# EAGLE board hx711-RJ12-board (EAGLE 8.7.1)
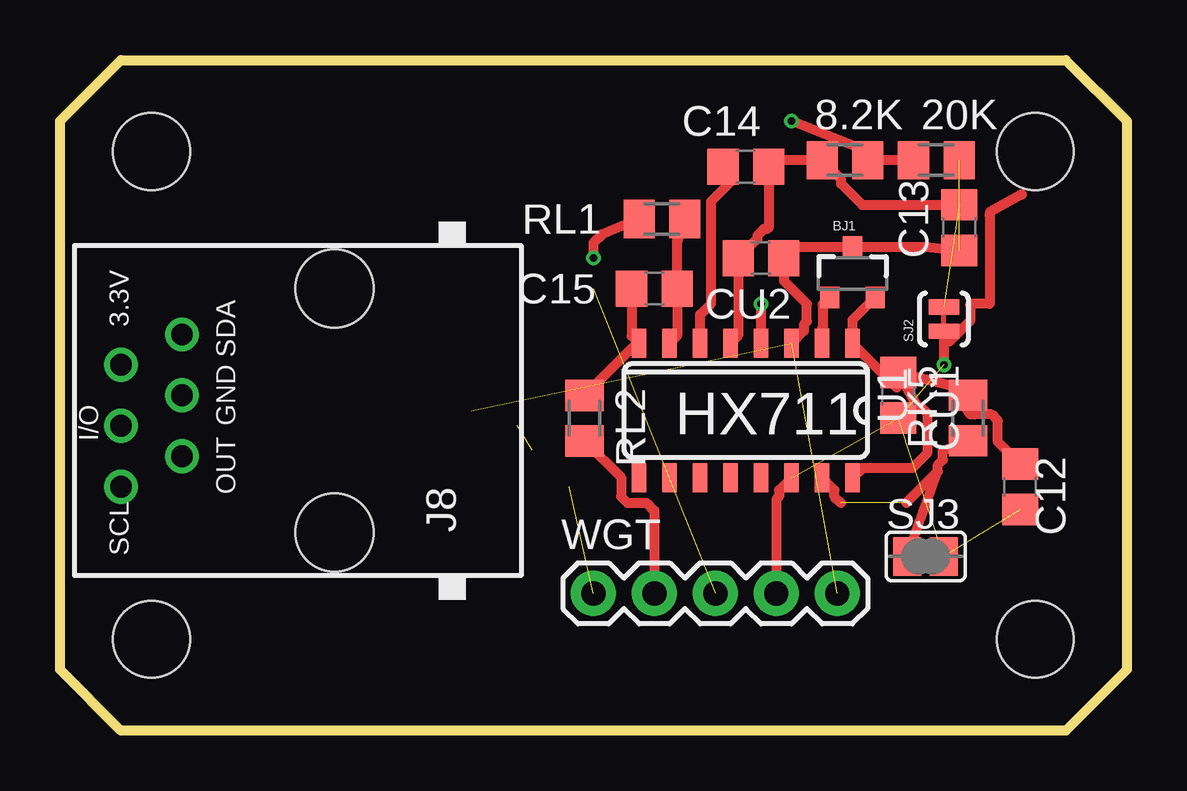
[diagram p0: board, top side]
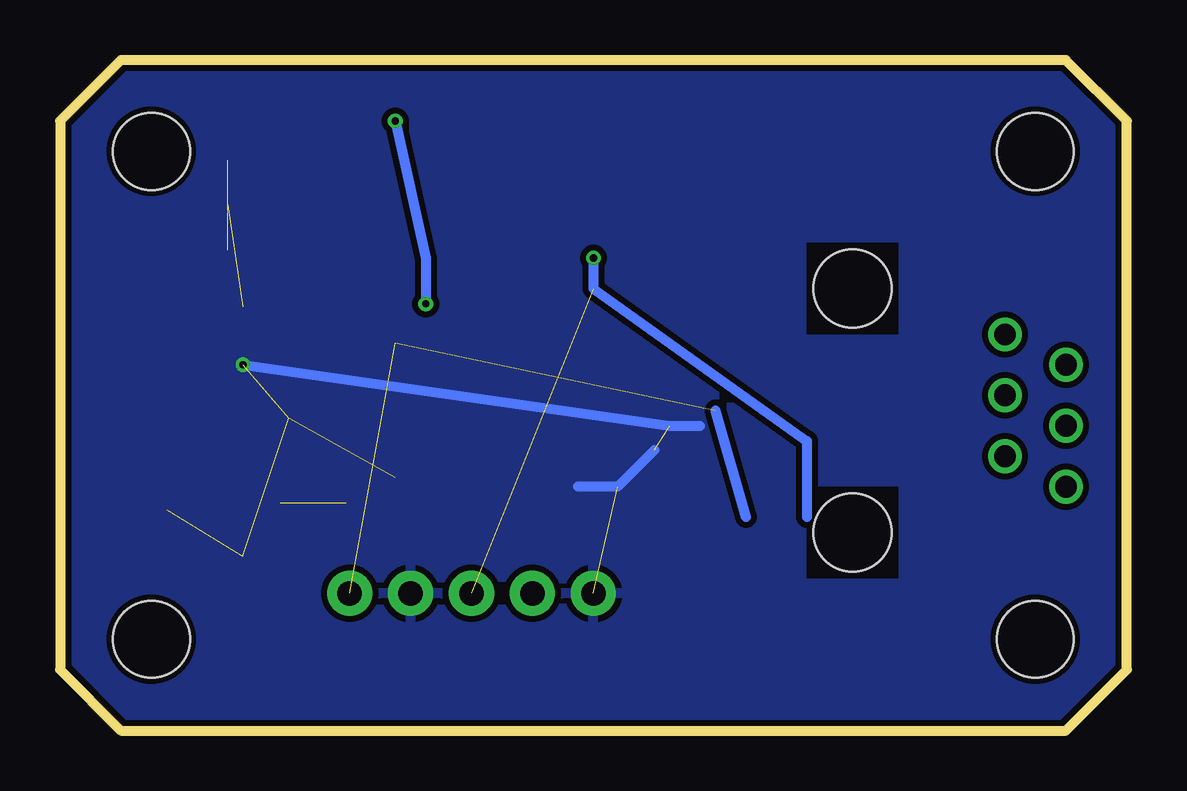
[diagram p1: board, bottom side, seen from below]

Size 44.45 x 27.94 mm. Coordinates in mm from the lower left corner, seen from the top.
Outline: 44.45,25.4 44.45,2.54 41.91,0 2.54,0 0,2.54 0,25.4 2.54,27.94 41.91,27.94 44.45,25.4
Copper layers (1*16): Top 0.035mm / dielectric 0.2mm / Bottom 0.035mm
Design rules "SeeedStudio_DRU_no_angle_20130527 *": minimum track width 6mil, minimum drill 12mil, track to track 6mil, track to pad 6mil, pad to pad 6mil, via to via 6mil, smd to smd 0mil, copper to edge 10mil, drill to drill 10mil, minimum pad ring 6mil, minimum via ring 6mil, stop-mask expansion 2mil, vias tented up to drill 25mil, thermal gap 10mil
Net classes: 0 default: width 0.406 mm, clearance 0.25 mm; 1 power: width 0.406 mm, drill 0.305 mm, clearance 0.25 mm; 2 VIN: width 0.406 mm, clearance 0.25 mm; 3 fine: width 0.406 mm, clearance 0.25 mm; 4 aref: width 0.406 mm, clearance 0.25 mm
Holes 3.2 mm at 40.64,24.13 40.64,3.81 3.81,24.13 3.81,3.81

## Footprints (pad centres in the part's own frame; a part is rotated, then mirrored left to right if it is on the bottom)
M0805 = smd 1.3 x 1.6: 1 -0.95,0; 2 0.95,0
SOT23-3 = smd 0.8 x 0.9: 1 -0.95,-1; 2 0.95,-1; 3 0,1.1
C0805 = smd 1.3 x 1.5: 1 -0.95,0; 2 0.95,0
RJ12-STRAIGHT-3.3 = drill 0.9 pad 1.4: +3.3V 1.905,8.89; GND 0.635,6.35; I/O -0.635,8.89; OUT -1.905,6.35; SCL -3.175,8.89; SDA 3.175,6.35 | hole 3.251: -5.08,0; 5.08,0
PAD-JUMPER-2-NC_BY_TRACE_YES_SILK = smd 0.635 x 1.27: 1 -0.508,0; 2 0.508,0
SJ = smd 1.168 x 1.6: 1 -0.762,0; 2 0.762,0
SO16 = smd 0.6 x 1.2: 1 -4.445,-2.8; 2 -3.175,-2.8; 3 -1.905,-2.8; 4 -0.635,-2.8; 5 0.635,-2.8; 6 1.905,-2.8; 7 3.175,-2.8; 8 4.445,-2.8; 9 4.445,2.8; 10 3.175,2.8; 11 1.905,2.8; 12 0.635,2.8; 13 -0.635,2.8; 14 -1.905,2.8; 15 -3.175,2.8; 16 -4.445,2.8
1X05 = drill 1.016 pad 1.88: 1 0,0; 2 2.54,0; 3 5.08,0; 4 7.62,0; 5 10.16,0

## Placement (x,y rotation side)
8.2K  8.2k  [M0805]  32.7,23.77 0 top
20K  20k  [M0805]  36.52,23.77 0 top
BJ1  MMBT4403  [SOT23-3]  33.02,19.05 0 top
C12  100n  [C0805]  40,10.16 270 top
C13  100n  [C0805]  37.47,20.95 90 top
C14  100n  [C0805]  28.58,23.49 180 top
C15  100n  [C0805]  24.77,18.41 0 top
CU1  10u  [C0805]  34.92,13.97 270 top
CU2  10u  [C0805]  29.21,19.69 180 top
J8  RJ123.3  [RJ12-STRAIGHT-3.3]  11.43,13.33 90 top
RK5  10k  [M0805]  37.83,13.02 90 top
RL1  100  [M0805]  25.08,21.32 180 top
RL2  100  [M0805]  21.86,13.01 270 top
SJ2  [PAD-JUMPER-2-NC_BY_TRACE_YES_SILK]  36.83,17.15 90 top
SJ3  [SJ]  36.07,7.26 0 top
U1  HX711  [SO16]  28.58,13.33 180 top
WGT  [1X05]  22.22,5.72 0 top

## Library data of the parts
8.2K 20K RK5 RL1 RL2 = resistor
BJ1 = SparkFun-DiscreteSemi; PROD_ID: TRANS-09245
C12-C15 CU1 CU2 = rcl
J8 = lpatiny
SJ2 = SparkFun-Passives
SJ3 = jumper
U1 = Testing; PROD_ID: IC-12445
WGT = SparkFun-Connectors

## Nets
3.3V [power]: BJ1.2 C12.1 CU1.1 RK5.2 U1.1 U1.16
A4: U1.12
A5: U1.11
A+: RL2.2 WGT.2
A-: RL1.2 WGT.3
CN3: C14.2 U1.6
GND [power]: C12.2 CU1.2 SJ2.1 SJ3.2 U1.14 WGT.1 WGT.4
LGND: 8.2K.1 C13.2 C14.1 CU2.2 SJ2.2 U1.5
N$2: 20K.2 BJ1.3 C13.1 CU2.1 U1.3 WGT.5
N$20: C15.2 RL1.1 U1.7
N$27: J8.SCL
N$28: J8.OUT
N$29: J8.I/O
N$30: J8.GND
N$31: J8.+3.3V
N$32: J8.SDA
N$38: BJ1.1 U1.2
N$39: 8.2K.2 20K.1 U1.4
N$41: RK5.1 SJ3.1 U1.15
N$43: C15.1 RL2.1 U1.8

## Tracks (layer width: path | path; a pad name or v marks a point on that pad's centre or on a via)
3.3V
  Top 0.406: BJ1.2 33.02,17.1 U1.1 34.87,14.28 CU1.1 | CU1.1 37.51,14.28 RK5.2 37.83,13.28 37.94,13.17 38.1,13.17 38.82,13.17 39.08,12.91 39.08,12.03 C12.1 | CU1.1 35.72,13.49 35.86,13.49 36.13,13.22 36.13,11.55 35.51,10.93 33.42,10.93 U1.16
A+
  Top 0.406: WGT.2 24.77,9.16 24.44,9.48 23.64,9.48 23.38,9.75 23.38,10.55 RL2.2
A-  (via drill 0.3)  (1 unrouted)
  Top 0.406: RL1.2 22.59,20.69 22.22,20.32 v22.22,19.69
  Bottom 0.406: v22.22,19.69 22.22,18.41 13.33,12.06 13.33,8.89
CN3
  Top 0.406: U1.6 26.67,17.33 27.13,17.79 27.13,22.05 27.94,22.86 27.94,23.18 C14.2
GND  (via drill 0.3)  (6 unrouted)
  Top 0.406: U1.14 29.96,10.02 29.96,9.75 29.84,9.63 WGT.4 | SJ2.1 36.83,16.21 | 36.83,16.21 v36.83,15.24 | 40.08,22.34 38.76,21.61 38.76,21.5 38.73,21.48 38.73,17.78 37.97,17.78 37.92,17.73 37.92,17.07 37.06,16.21 36.83,16.21
  Bottom 0.406: 19.69,11.69 21.22,10.16 22.86,10.16 | v36.83,15.24 19.05,12.7 17.78,12.7
  pour Bottom: 47.62,60.33 47.62,-8.25 45.08,-10.79 -48.9,-10.79 -51.44,-8.25 -51.44,60.33 -48.9,62.86 45.08,62.86
LGND  (1 unrouted)
  Top 0.406: U1.5 28.26,16.45 CU2.2 29.06,20.48 29.06,20.62 29.32,20.89 29.46,20.89 29.52,20.95 C14.1 29.8,23.77 8.2K.1 32.55,22.97 32.55,22.78 33.42,21.91 C13.2
N$2  (3 unrouted)
  Top 0.406: U1.3 31,16.65 31,16.92 31.11,17.04 31.11,17.78 30.16,18.73 CU2.1 30.62,20.15 BJ1.3 36.05,20.15 C13.1
  Bottom 0.406: 17.14,13.33 15.88,8.89
N$20
  Top 0.406: U1.7 25.72,16.45 C15.2 25.72,20.37 RL1.1
N$38
  Top 0.406: BJ1.1 31.77,17.75 31.77,16.77 31.75,16.75 U1.2
N$39  (via drill 0.3)
  Top 0.406: 20K.1 8.2K.2 33.66,24.13 v30.48,25.4 | U1.4 v29.21,17.78
  Bottom 0.406: v30.48,25.4 29.21,19.69 v29.21,17.78
N$41  (1 unrouted)
  Top 0.406: SJ3.1 36.58,10.79 | 36.58,10.79 36.58,11.07 36.78,11.28 36.78,11.66 RK5.1 | 32.53,9.48 32.27,9.75 32.27,10.02 U1.15 | 36.58,10.79 35.26,9.48
N$43
  Top 0.406: C15.1 23.81,16.45 U1.8 24.03,16.13 RL2.1

## Text on the board
tNames: HX711
bNames: 1 | BLK
tValues: GND | + | GND | GND | BeeMoS Master / V1.0
bValues: BeeMoS Master / V 1.0